# Altium PCB Temperature_Controller_2.PcbDoc
Units mm, origin at the board's own origin, x right, y up, seen from the top; angles counter-clockwise.
Board outline 86.61 x 96.9 mm, 2 copper layers (Top Layer, Bottom Layer), stack 1.4 mm thick; 29 components, 31 nets, 114 pads, 11 vias.
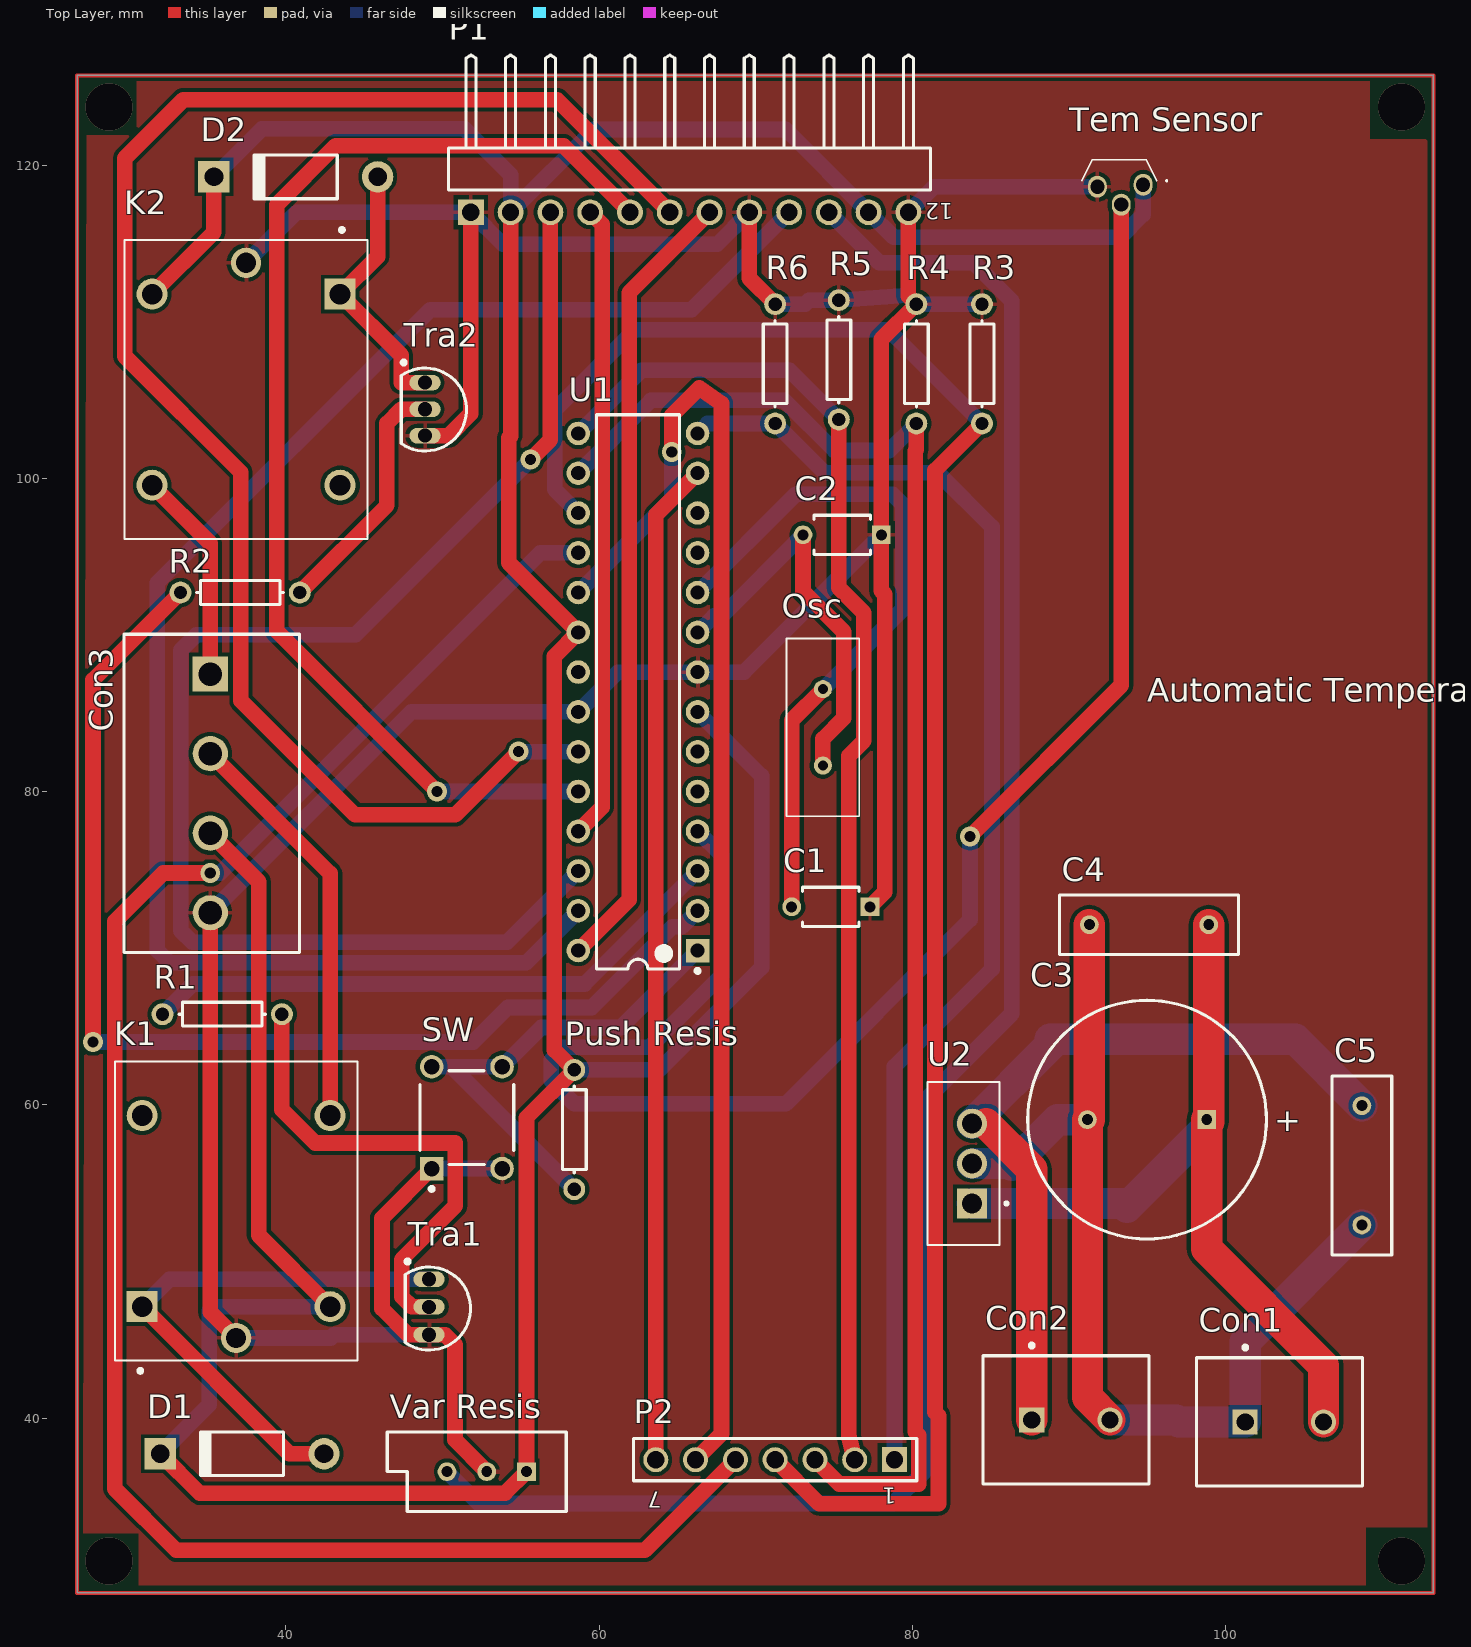
[diagram p0: Top Layer view]
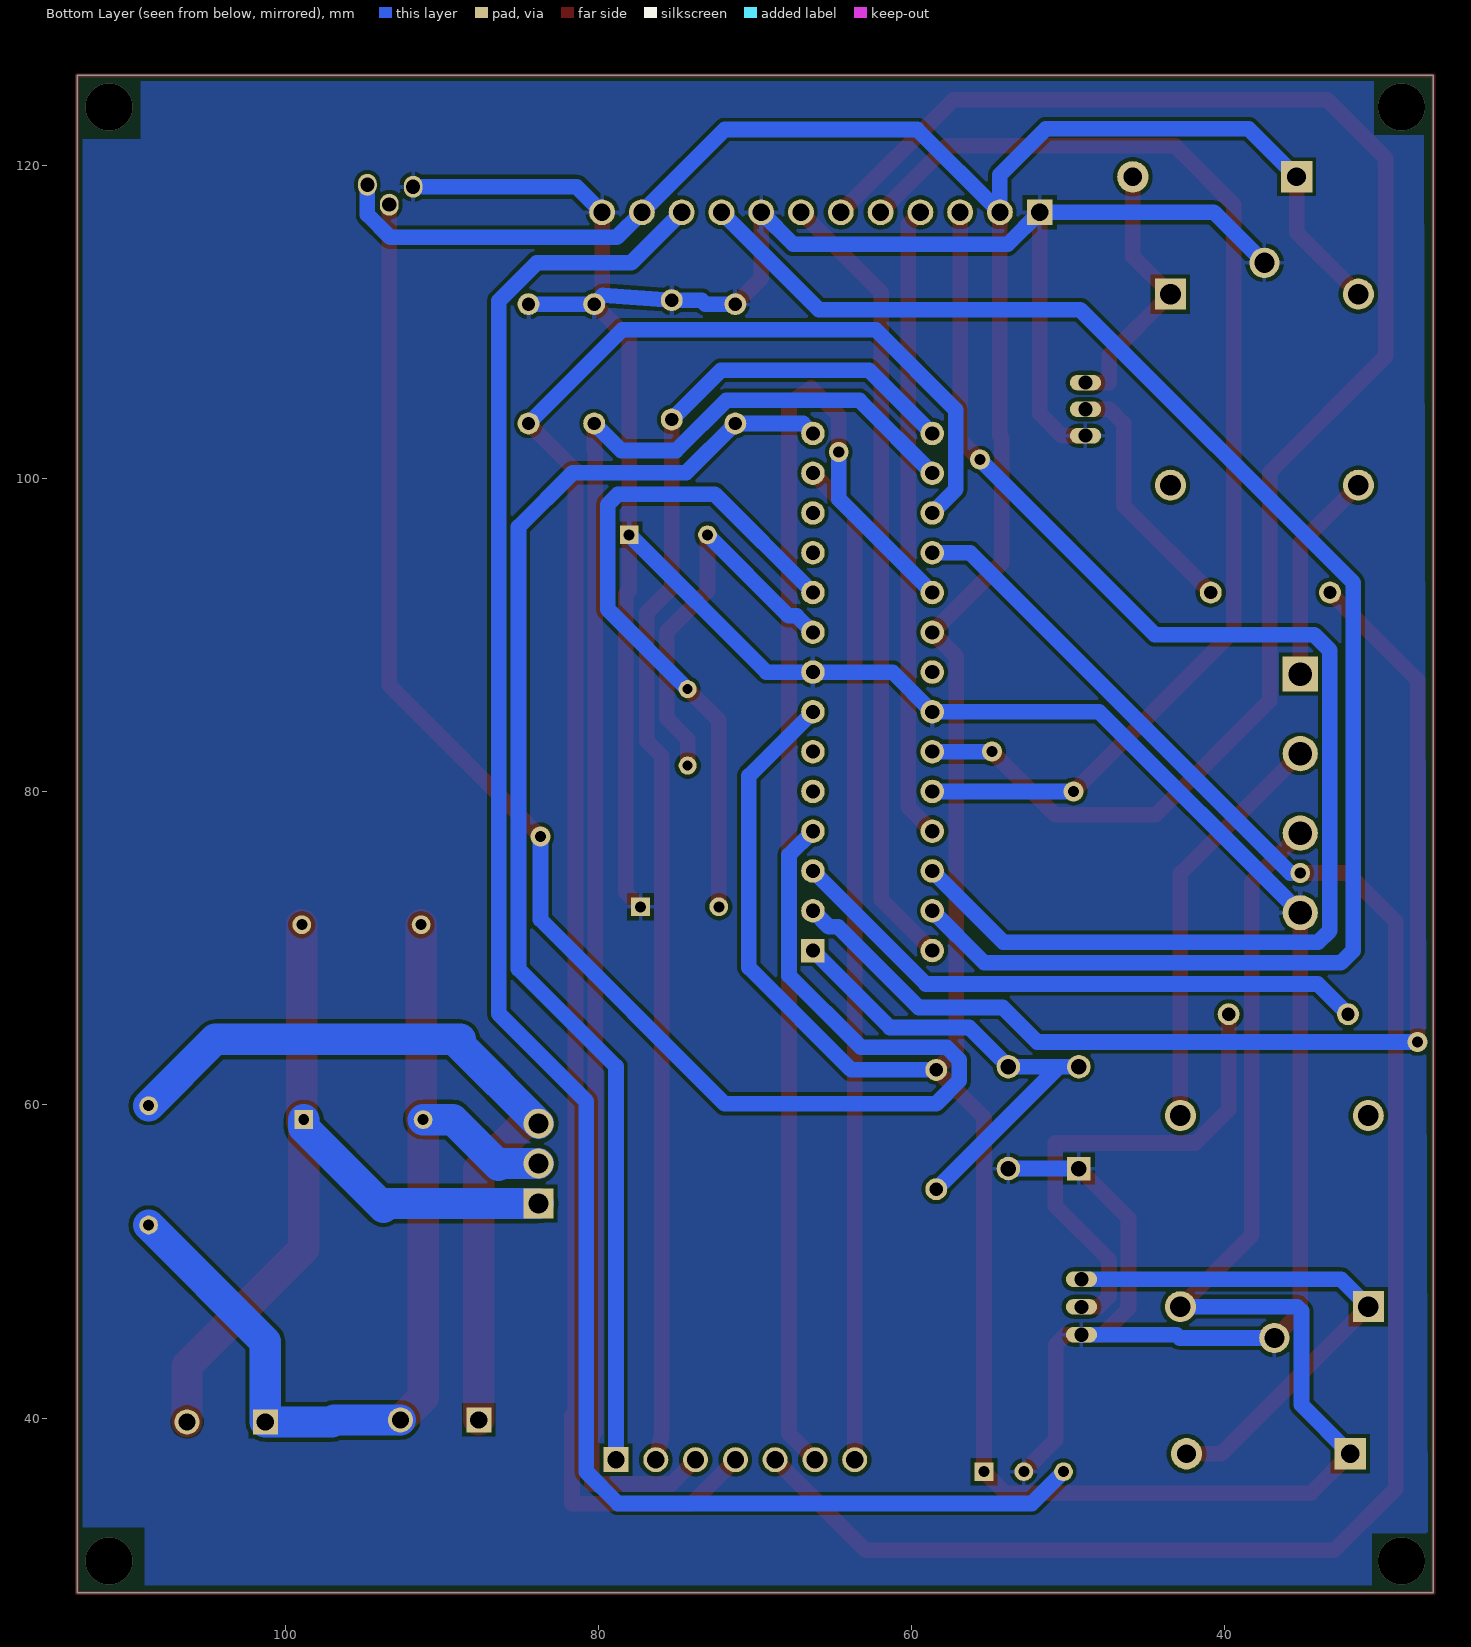
[diagram p1: Bottom Layer view, seen from below]

## Layer stack, top to bottom
Top Solder: solder mask 0.1, Solder Resist, Dk 3.5
Top Layer: signal copper 0.3
Dielectric 1: dielectric 0.8, FR-4, Dk 4.8
Bottom Layer: signal copper 0.3
Bottom Solder: solder mask 0.1, Solder Resist, Dk 3.5

## Board outline
26.67,28.829 26.67,125.73 113.284,125.73 113.284,28.829

## Design rules (kind name [scope] priority, off if disabled: settings)
Clearance [All] p1: gap=0.254 ignorepadtopadclearanceinfootprint=FALSE except(0: Arc-Hole Track-Hole SMDPad-Hole THPad-Hole Via-Hole Fill-Hole Poly-Hole Region-Hole Text-Hole)
HoleSize [All] p1: absolutevalues=TRUE maxlimit=3 minlimit=0.025 maxpercent=80.000 minpercent=20.000
PolygonConnect [All] p1: connectstyle=Relief reliefconductorwidth=0.254 reliefentries=4 polygonreliefangle="90 Angle" airgapwidth=0.254
RoutingVias [All] p1: holewidth=0.711 width=1.27 viastyle="Through Hole" minholewidth=0.711 minwidth=1.27 maxholewidth=0.711 maxwidth=1.27
SilkToSolderMaskClearance [IsText] p1: minsilkscreentomaskgap=0.254 clearancetoexposedcopper=TRUE
SolderMaskExpansion [All] p1: expansion=0.102 istentingtop=FALSE
Width [All] p1: maxlimit=2 minlimit=0.254 preferedwidth=1
28 further rules are at their usual default settings.

## Components (designator, comment, footprint, x,y, rotation, side; value= is the part's Value field where it differs from the comment)
C1 "" FP-RCE0K1-MFG 74.803,72.644 r180 top
C2 "" FP-RCE0K1-MFG 75.525,96.393 r180 top
C3 "Cap Pol1" RB7.6-15 94.996,59.055 r0 top value=470uF
C4 "Cap" RAD-0.3 95.123,71.501 r0 top value=0.01uF
C5 "Cap" RAD-0.3 108.712,56.134 r90 top value=0.01uF
Con1 "282836-2" TECO-282836-2_V 103.759,39.751 r0 top
Con2 "282836-2" TECO-282836-2_V 90.13,39.878 r0 top
Con3 "691244510004" 691244510004 35.279,79.883 r270 top
D1 "Diode 1N4004" DO-41 37.211,37.719 r180 top
D2 "Diode 1N4004" DO-41 40.64,119.253 r180 top
K1 "SRD-05VDC-SL-C" RELAY_SRD-05VDC-SL-C 36.83,53.213 r90 top
K2 "SRD-05VDC-SL-C" RELAY_SRD-05VDC-SL-C 37.465,105.664 r270 top
Osc "ECS-80-20-4X" ECS80204X 74.295,81.661 r90 top
P1 "61301211021" 61301211021 65.786,119.761 r180 top
P2 "61300711121" 61300711121 71.247,37.338 r180 top
"Push Resis" "Res1" AXIAL-0.3 58.42,58.42 r90 top value=10K (schematic designator "Resis Push?")
R1 "Res1" AXIAL-0.3 35.941,65.786 r180 top value=10K
R2 "Res1" AXIAL-0.3 37.084,92.71 r180 top value=10K
R3 "Res1" AXIAL-0.3 84.455,107.315 r270 top value=10K
R4 "Res1" AXIAL-0.3 80.264,107.315 r270 top value=10K
R5 "Res1" AXIAL-0.3 75.311,107.569 r270 top value=10K
R6 "Res1" AXIAL-0.3 71.247,107.315 r270 top value=10K
SW "1825910-6" TECO-1825910-6_V 51.562,59.182 r90 top (schematic designator SW?)
"Tem Sensor" "LM35CZ_NOPB" TL431CLP 94.488,118.999 r0 top
Tra1 "NPN" TO-226-AA#1 49.149,46.99 r180 top
Tra2 "NPN" TO-226-AA#2 48.895,104.394 r180 top
U1 "ATmega328P-PU" 28P3 62.484,86.36 r180 top
U2 "L7805CV" TO255P1040X460X1968-3 83.82,53.701 r90 top
"Var Resis" "RPot" VR5 52.832,36.576 r180 top value=1K (schematic designator "Var Resis?")

## Footprints (in the part's own frame and the unit in brackets; to place one, negate y for a bottom-side part, rotate by r counter-clockwise, add the part's x,y. Pads: shape width x height; smd on the part's side, far side on the other; paste and mask are expansions set on the pad)
28P3 [mm] "28-Pin Plastic Dual In-Line Package (PDIP)"
  rect 1.5x1.5 hole 0.9: 1(-3.81,16.51)
  round 1.5 hole 0.9: 2(-3.81,13.97) 3(-3.81,11.43) 4(-3.81,8.89) 5(-3.81,6.35) 6(-3.81,3.81) 7(-3.81,1.27) 8(-3.81,-1.27) 9(-3.81,-3.81) 10(-3.81,-6.35) 11(-3.81,-8.89) 12(-3.81,-11.43) 13(-3.81,-13.97) 14(-3.81,-16.51) 15(3.81,-16.51) 16(3.81,-13.97) 17(3.81,-11.43) 18(3.81,-8.89) 19(3.81,-6.35) 20(3.81,-3.81) 21(3.81,-1.27) 22(3.81,1.27) 23(3.81,3.81) 24(3.81,6.35) 25(3.81,8.89) 26(3.81,11.43) 27(3.81,13.97) 28(3.81,16.51)
  silkscreen extent -3.94,-17.7 2.65,17.93, body extent -3.6,-17.65 3.6,17.65, height 4.58
61300711121 [mm] "Pin Header, pitch 2.54 mm, THT, Vertical, single row, 7p"
  rect 1.6x1.6 hole 1.1: 1(-7.62,0)
  round 1.6 hole 1.1: 2(-5.08,0) 3(-2.54,0) 4(0,0) 5(2.54,0) 6(5.08,0) 7(7.62,0)
  silkscreen extent -9.04,-1.34 9.04,1.34, body extent -8.89,-1.27 8.89,1.27, height 8.57
61301211021 [mm] "Pin Header, pitch 2.54 mm, THT, Angled, single row, 12p"
  rect 1.65x1.65 hole 1.1: 1(13.97,2.77)
  round 1.65 hole 1.1: 2(11.43,2.77) 3(8.89,2.77) 4(6.35,2.77) 5(3.81,2.77) 6(1.27,2.77) 7(-1.27,2.77) 8(-3.81,2.77) 9(-6.35,2.77) 10(-8.89,2.77) 11(-11.43,2.77) 12(-13.97,2.77)
  silkscreen extent -15.39,-7.27 15.39,1.34, body extent -15.24,-7.27 15.24,3.09, height 2.58
691244510004 [mm] "Serie 2445 - 5.08 mm _ 4 pins"
  rect 2.25x2.25 hole 1.5: 1(-7.62,-0.1)
  round 2.25 hole 1.5: 2(-2.54,-0.1) 3(2.54,-0.1) 4(7.62,-0.1)
  silkscreen extent -10.16,-5.6 10.16,5.6, body extent -10.16,-5.6 10.16,5.6, height 18.1
AXIAL-0.3 [mm] "Axial Device, Thru-Hole; 2 Leads; 0.3 in Pin Spacing"
  round 1.4 hole 0.85: 1(-3.81,0) 2(3.81,0)
  silkscreen extent -2.77,-0.76 2.77,0.76
DO-41 [mm] "Diode, Axial; Body 5.2 x 2.7 mm (LxDia. max), Lead Dia. 0.86 mm (max)"
  round 2 hole 1.2: 1(-5.23,0)
  rect 2x2 hole 1.2: 2(5.23,0)
  silkscreen extent -2.65,-1.4 2.75,1.4
ECS80204X [mm]
  round 1.155 hole 0.63: 1(0,0) 2(4.88,0)
  silkscreen extent -3.23,-2.33 8.11,2.33
FP-RCE0K1-MFG [mm]
  rect 1.2x1.2 hole 0.7 paste-1000 mask+0: 1(-2.5,0)
  round 1.2 hole 0.7 paste-1000 mask+0: 2(2.5,0)
  silkscreen extent -1.8,-1.25 1.8,1.25, body extent -3.2,-1.35 3.2,1.35, height 0.25
RAD-0.3 [mm] "Radial Cap, Thru-Hole; 2 Leads; 0.3 in Pin Spacing"
  round 1.2 hole 0.7: 1(-3.81,0) 2(3.81,0)
  silkscreen extent -5.71,-1.91 5.71,1.91
RB7.6-15 [mm] "Polarized Capacitor (Radial); 2 Leads"
  rect 1.2x1.2 hole 0.7: 1(3.81,0)
  round 1.2 hole 0.7: 2(-3.81,0)
  silkscreen extent -7.62,-7.62 7.62,7.62
RELAY_SRD-05VDC-SL-C [mm]
  rect 1.98x1.98 / inner round 1.98 / far side rect 1.98x1.98 hole 1.32: A1(-6.1,6)
  round 1.98 hole 1.32: A2(-6.1,-6) NC(6.1,6) NO(6.1,-6)
  round 1.935 hole 1.29: COM(-8.1,0)
  silkscreen extent -10.3,-7.75 9.55,7.75, body extent -9.6,-7.8 9.6,7.8, height 15.8
TECO-282836-2_V [mm] "Female Header, Pitch 5mm, 1 x 2 Position, Height 10mm"
  rect 1.6x1.6 hole 1.1: 1(-2.5,0)
  round 1.6 hole 1.1: 2(2.5,0)
  silkscreen extent -5.6,-4.1 5,4.87, body extent -5.6,-4.1 5,4.1, height 10
TECO-1825910-6_V [mm] "Switch, 4-Leads, Body 5.99x5.99mm"
  rect 1.5x1.5 hole 0.99: 1(-3.25,2.25)
  round 1.5 hole 0.99: 2(3.25,2.25) 3(-3.25,-2.25) 4(3.25,-2.25)
  silkscreen extent -4.67,-3 3,3, body extent -3,-2.99 2.99,3, height 5
TL431CLP [mm]
  oval 1.2x1.4 hole 0.9: 1(0.254,-0.254) 2(-1.143,-1.524) 3(-2.667,-0.381)
  silkscreen extent -3.67,-0.05 1.81,1.35, body extent -3.81,-3.3 1.02,0.38, height 12.52
TO255P1040X460X1968-3 [mm]
  rect 1.91x1.91 / inner round 1.91 / far side rect 1.91x1.91 hole 1.27: 1(0,0)
  round 1.91 hole 1.27: 2(2.55,0) 3(5.1,0)
  silkscreen extent -2.65,-2.29 7.75,2.86, body extent -4.98,-1.76 4.98,2.69, height 19.68
TO-226-AA#1 [mm] "TO, Flat Index; 3 In-Line, Axial Leads; Body Dia. 4.8mm; Leads 0.55 x 0.51 mm (max)"
  oval 2x1 hole 0.9: 1(0,-1.87) 2(0,-0.11) 3(0,1.67)
  silkscreen extent -2.65,-3.13 1.52,2.65, body extent -2.65,-2.66 1.52,2.66, height 5.33
TO-226-AA#2 [mm] "TO, Flat Index; 3 In-Line, Axial Leads; Body Dia. 4.8mm; Leads 0.55 x 0.51 mm (max)"
  oval 2x1 hole 0.9: 1(0,-1.72) 2(0,-0.02) 3(0,1.67)
  silkscreen extent -2.65,-3.13 1.52,2.65, body extent -2.65,-2.66 1.52,2.66, height 5.33
VR5 [mm] "Thru-Hole; 3 Leads"
  rect 1.2x1.2 hole 0.7: 1(-2.54,0)
  round 1.2 hole 0.7: 2(0,0) 3(2.54,0)
  silkscreen extent -5.08,-2.54 6.35,2.54

## Part data
C1 C2: library part CMP-06035-004895-1, "Cap Ceramic 22pF 50V C0G ±5% Radial 5mm +125°C Automotive Bulk", Capacitance=22pF, Case/Package=Radial, Dielectric=C0G, Max Operating Temperature=125°C, Min Operating Temperature=-55°C, Package Quantity=2000, Ratings=AEC-Q200, Resistor Type=Ceramic, Tolerance=5%, Voltage Rating=50V, Height=3.5mm, Height - Seated (Max)=0.138inch, Lead Diameter=0.5mm, Lead Pitch=0.197inch, Lead/Base Style="Formed Leads", Length=0.142inch, Mount="Through Hole", Packaging="Tape and Reel", Termination=Radial, Voltage Rating (DC)=50V, Width=0.098inch
C3: "Polarized Capacitor (Radial)", LatestRevisionDate=17-Jul-2002, LatestRevisionNote="Re-released for DXP Platform.", PackageDescription="Polarized Capacitor (Radial); 2 Leads", PackageReference=RB7.6-15, Published=8-Jun-2000, Publisher="Altium Limited"
C4 C5: "Capacitor", LatestRevisionDate=17-Jul-2002, LatestRevisionNote="Re-released for DXP Platform.", PackageDescription="Radial Cap, Thru-Hole; 2 Leads; 0.3 in Pin Spacing", PackageReference=RAD-0.3, Published=8-Jun-2000, Publisher="Altium Limited"
Con1 Con2: library part CMP-1684-00017-1, "Female Header, Pitch 5 mm, 1 x 2 Position, Height 10 mm, Tail Length 3.5 mm, Rohs, Bulk", Color=Green, Current=13.5A, Manufacturer="TE Connectivity", Package Description="Female Header, Pitch 5 mm, 1 x 2 Position, Height 10 mm, Tail Length 3.5 mm", Package Reference=THD, Standard Package=300, Voltage=300V, 3D Model=282836-2.pdf, Category=Connectors,Interconnects, Clamp Material - Plating=Brass-NickelPlated, Contact Material - Plating=Brass-TinPlated, Datasheet URL=http://www.te.com.cn/commerce/DocumentDelivery/DDEController?Action=showdoc&DocId=Catalog+Section%7F1308389_EUROSTYLE_TERMINAL_BLOCKS%7F0607%7Fpdf%7FEnglish%7FENG_CS_1308389_EUROSTYLE_TERMINAL_BLOCKS_0607.pdf%7F282836-2, Dynamic Catalog=BuchananSeries, Family=TerminalBlocks-WiretoBoard, Featured Product=EurostyleTerminalBlockConnectors, Features=Interlocking(Side), Housing Material=Polyamide(PA66),Nylon6/6, Manufacturer URL=http://www.te.com, Mating Orientation=HorizontalwithBoard, Mounting Type=ThroughHole, Number of Levels=1, Other Names="5ULV-02B / A98076", Packaging=Bulk, Pitch="0.197\"(5.00mm)", Positions Per Level=2, Product Training Modules=Wire-to-BoardEurostyleTerminalBlocks, RoHS Information=282836-2StatementofCompliance, Screw Material - Plating=Brass-NickelPlated, Screw Thread=M3, Series=Buchanan, Torque - Screw=0.68Nm(6Lb-In), Wire Gauge=16-30AWG, Wire Termination=Screw-RisingCageClamp
Con3: library part CMP-1502-02650-1, "Serie 2445 - 5.08 mm Horizontal Entry Modular with Rising Cage Clamp WR-TBL, 4 pin", Manufacturer="Wurth Elektronik", Operating Temperature=-30to120degC, Datasheet URL=http://katalog.we-online.de/em/datasheet/6912445100xx.pdf, Manufacturer URL=http://www.we-online.de, Mounting Technology=THT, Package Reference=691244510004, Packaging=Box, Part Number=691244510004, Pin Number=4, Pitch=5.08mm, Publisher=WurthElektronik
D1 D2: "1 Amp General Purpose Rectifier", Code_JEDEC=DO-204-AL, ComponentLink1Description="Manufacturer Link", ComponentLink1URL=http://www.fairchildsemi.com/, ComponentLink2Description=Datasheet, ComponentLink2URL=http://www.fairchildsemi.com/ds/1N%2F1N4001.pdf, DatasheetVersion=1998, LatestRevisionDate=17-Jul-2002, LatestRevisionNote="Re-released for DXP Platform.", PackageDescription="Diode, Axial; Body 5.2 x 2.7 mm (LxDia. max), Lead Dia. 0.86 mm (max)", PackageReference=DO-41, PackageVersion=Aug-1999, Published=8-Jun-2000, Publisher="Altium Limited"
K1 K2: "5V Trigger Relay Module For Arduino And Raspberry Pi 5V Trigger Relay Module For Arduino And Raspberry Pi", Package="NON STANDARD-5 Songle Relay", Availability="Not in stock", Check_prices=https://www.snapeda.com/parts/SRD-05VDC-SL-C/Songle+Relay/view-part/?ref=eda, MF="Songle Relay", MP=SRD-05VDC-SL-C, Price=None, SnapEDA_Link=https://www.snapeda.com/parts/SRD-05VDC-SL-C/Songle+Relay/view-part/?ref=snap
Osc: "Crystals 8MHz 20pF", Manufacturer_Name=ECS, Mouser Part Number=520-HCU800-20X, Datasheet Link=https://componentsearchengine.com/Datasheets/1/ECS-80-20-4X.pdf, Geometry.Height=3.5mm, Manufacturer_Part_Number=ECS-80-20-4X, Mouser Price/Stock=https://www.mouser.co.uk/ProductDetail/ECS/ECS-80-20-4X?qs=Plv2eWRe7VJH6hqFYPCsSw%3D%3D
P1: library part CMP-1502-01085-1, "THT Angled Pin Header WR-PHD, Pitch 2.54 mm, Single Row, 12 pins", Contact Resistance=20mOhm, Manufacturer="Wurth Elektronik", Operating Temperature=-40to105degC, Rated Current=3A, Withstanding Voltage=500VAC, Working Voltage=250VAC, Datasheet URL=https://katalog.we-online.de/em/datasheet/6130xx11021.pdf, Gender=Male, Manufacturer URL=http://www.we-online.de, Mounting Technology=THT, Orientation=Angled, Package Reference=61301211021, Packaging=Bag, Part Number=61301211021, Pin Number=12, Pitch=2.54mm, Publisher=WurthElektronik, Row Number=Single
P2: library part CMP-1502-01074-1, "THT Vertical Pin Header WR-PHD, Pitch 2.54 mm, Single Row, 7 pins", Contact Resistance=20mOhm, Manufacturer="Wurth Elektronik", Operating Temperature=-40to105degC, Rated Current=3A, Withstanding Voltage=500VAC, Working Voltage=250VAC, Datasheet URL=https://katalog.we-online.de/em/datasheet/6130xx11121.pdf, Gender=Male, Manufacturer URL=http://www.we-online.de, Mounting Technology=THT, Orientation=Vertical, Package Reference=61300711121, Packaging=Bag, Part Number=61300711121, Pin Number=7, Pitch=2.54mm, Publisher=WurthElektronik, Row Number=Single
"Push Resis" R1 R2 R3 R4 R5 R6: "Resistor", LatestRevisionDate=17-Jul-2002, LatestRevisionNote="Re-released for DXP Platform.", PackageDescription="Axial Device, Thru-Hole; 2 Leads; 0.3 in Pin Spacing", PackageReference=AXIAL-0.3, Published=8-Jun-2000, Publisher="Altium Limited"
SW: library part CMP-1684-00021-1, "Tact Switch, SPST-NO, 0.05 A, -35 to 85 degC, 4-Pin THD, RoHS, Bulk", Actuator Color=Black, Contact Rating @ Voltage=0.05A@24VDC, Dielectric Strength=500VAC, Manufacturer="TE Connectivity", Maximum AC Voltage Rating=N/A, Maximum Contact Resistance=100mOhm, Maximum DC Voltage Rating=24V, Minimum Insulation Resistance=100MOhm, Operating Temperature=-35to85C, Package Description="4-Pin Through Hole Device, Body 5.99 x 5.99 mm, Pitch 6.5 mm", Package Reference=THD, Actuator Length=1.4mm, Actuator Material=PolybutyleneTerephthalate, Actuator Style=RoundButton, Base Material=N/A, Body Orientation=Straight, Bushing Type=Unthreaded, Contact Material=CopperAlloy, Contact Plating=Silver, Datasheet URL=http://www.te.com/commerce/DocumentDelivery/DDEController?Action=showdoc&DocId=Customer+Drawing%7F1825910%7FC9%7Fpdf%7FEnglish%7FENG_CD_1825910_C9.pdf%7F1825910-6, Datasheet Version="Rev. C9", Dimension=5.99x5mm, Electrical Life=100000Cycles, Family=1825910, Function=MomentaryContact, Housing Material=N/A, Illumination=N/R, Manufacturer URL=http://www.te.com, Mechanical Life=100000Cycles, Mounting=ThroughHole, Packaging=N/A, Part No=1825910-6, Pole Throw Configuration=SPST, Product Weight=N/A, RoHS=Yes, Seal Description=N/A, Seal Location=N/A, Switch Configuration=OFF(ON), Terminal Type=PCPins, Thread Size=N/R
"Tem Sensor": "+/-0.5C Temperature Sensor with Analog Output and 30V Capability", Manufacturer_Name="Texas Instruments", Manufacturer_Part_Number=LM35CZ/NOPB, Mouser Part Number=926-LM35CZ/NOPB, Datasheet Link=http://www.ti.com/lit/gpn/LM35, Geometry.Height=9.34mm, Mouser Price/Stock=https://www.mouser.co.uk/ProductDetail/Texas-Instruments/LM35CZ-NOPB?qs=QbsRYf82W3Fna65sQVTdFw%3D%3D
Tra1 Tra2: "NPN Bipolar Transistor", Code_JEDEC=TO-226-AA, LatestRevisionDate=17-Jul-2002, LatestRevisionNote="Re-released for DXP Platform.", PackageDescription="TO, Flat Index; 3 In-Line, Axial Leads; Body Dia. 4.8mm; Leads 0.55 x 0.51 mm (max)", PackageReference=TO-226-AA, Published=8-Jun-2000, Publisher="Altium Limited"
U1: library part CMP-0095-00013-2, "8-bit AVR Microcontroller, 32KB Flash, 1KB EEPROM, 2KB SRAM, 28-pin PDIP, Industrial Grade (-40°C to 85°C)", ComponentLink1Description="Manufacturer URL", ComponentLink1URL=http://www.atmel.com/, ComponentLink2Description="ATmega48A/48PA/88A/88PA/168A/168PA/328/328P Datasheet", ComponentLink2URL=http://www.atmel.com/dyn/resources/prod_documents/8271.pdf, ComponentLink3Description="ATmega48A/48PA/88A/88PA/168A/168PA/328/328P Summary", ComponentLink3URL=http://www.atmel.com/dyn/resources/prod_documents/8271S.pdf, DatasheetVersion="revD, May-2011", PackageDescription="28-lead (0.300\"/7.62mm Wide) Plastic Dual Inline Package (PDIP)", PackageReference=28P3, PackageVersion="revB, Sep-2001", RevisionNote="DatasheetVersion updated. URLs added."
U2: "Linear Voltage Regulator IC Positive Fixed 1 Output 1.5A TO-220", Package="TO-220-3 ON Semiconductor", Availability="In Stock", Check_prices=https://www.snapeda.com/parts/L7805CV/STMicroelectronics/view-part/?ref=eda, MF=STMicroelectronics, MP=L7805CV, Price=None, Purchase-URL=https://pricing.snapeda.com/search/part/L7805CV/?ref=eda, SnapEDA_Link=https://www.snapeda.com/parts/L7805CV/STMicroelectronics/view-part/?ref=snap
"Var Resis": "Potentiometer", LatestRevisionDate=17-Jul-2002, LatestRevisionNote="Re-released for DXP Platform.", PackageDescription="Variable Resistor, Thru-Hole; 3 Leads", PackageReference=VR5, Published=8-Jun-2000, Publisher="Altium Limited", Set Position=0.5, Sim Note="Enter the Resistance value and the set point into parameter fields."

## Via types
v1: diameter 1.27, hole 0.711, Top Layer to Bottom Layer, 7 vias
v2: diameter 3, hole 3, Top Layer to Bottom Layer, 4 vias

## Nets (pads, with @x,y where several pads share a name; then routed paths per layer and width w, separated by ;. In a path a pad name is that pad's centre, name@x,y a point inside that pad or via, vN(x,y) a via of type N, cw(c..) or ccw(c..) an arc to the next point about the centre after c; other vN are vias at no path point)
GND: "Tem Sensor.3" "Var Resis.2" C1.1 C2.1 Con3.4 K1.COM K2.COM P1.1 P1.8 P1.12 R3.1 R4.1 R5.1 R6.1 SW.1 SW.3 Tra1.3 Tra2.3 U1.8 U1.22 | length 252.7
  Top Layer w1: Con3.4 35.179,46.764 K1.COM ; Tra2.3 50.4,102.724 51.816,104.14 P1.1 ; SW.1 46.141,52.761 46.141,46.99 47.811,45.32 Tra1.3 50.165,45.32 50.8,44.685 50.8,38.608 52.832,36.576 ; P1.8 69.596,112.776 R6.1 ; C1.1 78.251,73.592 78.251,92.602 78.025,92.828 C2.1 78.025,108.886 R4.1 79.756,111.633 P1.12
  Bottom Layer w1: Con3.4 48.006,85.09 U1.22 61.214,87.63 U1.8 69.262,87.63 C2.1 ; K1.COM 42.875,45.113 43.082,45.32 Tra1.3 ; K2.COM 40.692,116.991 P1.1 53.869,114.938 67.543,114.938 P1.8 ; SW.1 SW.3 ; R6.1 73.152,111.125 73.406,111.379 R5.1 79.705,111.684 R4.1 R3.1 ; P1.12 81.383,118.618 91.821,118.618
NetC1_2: C1.2 Osc.2 U1.10 | length 44.6
  Top Layer w1: C1.2 72.303,84.549 Osc.2
  Bottom Layer w1: U1.10 72.568,98.984 78.74,98.984 79.4,98.323 79.4,91.646 Osc.2
NetC2_2: C2.2 Osc.1 U1.9 | length 25.7
  Top Layer w1: C2.2 73.025,92.812 75.63,90.207 75.63,84.698 74.295,83.363 Osc.1
  Bottom Layer w1: U1.9 67.341,91.217 67.849,91.217 C2.2
NetC3_1: C3.1 C4.2 Con1.2 U2.1 | length 52.8
  Top Layer w1: C3.1 C3.1@98.933,58.928
  Top Layer w2: C3.1 98.806,50.8 106.259,43.347 Con1.2 ; C3.1@98.933,58.928 C4.2
  Bottom Layer w1: 93.472,53.701 93.716,53.457
  Bottom Layer w2: U2.1 93.472,53.701 ; 93.716,53.457 98.806,58.547 C3.1
NetC3_2: C3.2 C4.1 C5.1 Con1.1 Con2.2 U2.2 | length 65.2
  Top Layer w2: C3.2 91.186,41.322 Con2.2 ; C3.2@91.313,59.055 C4.1
  Bottom Layer w1: 86.261,56.251 86.369,56.143 ; 96.876,39.878 97.003,39.751
  Bottom Layer w2: U2.2 86.261,56.251 ; 86.369,56.143 89.281,59.055 C3.2 ; Con2.2 96.876,39.878 ; 97.003,39.751 Con1.1 101.259,44.871 C5.1
NetC5_2: C5.2 Con2.1 U2.3 | length 50.1
  Top Layer w1: U2.3 U2.3@84.709,58.801
  Top Layer w2: U2.3@84.709,58.801 87.63,55.88 Con2.1
  Bottom Layer w1: 88.814,63.795 88.814,64.186
  Bottom Layer w2: U2.3 88.814,63.795 ; 88.814,64.186 104.47,64.186 C5.2
NetCon3_1: Con3.1 K2.NO | length 13.6
  Top Layer w1: K2.NO 35.179,95.85 Con3.1
NetCon3_2: Con3.2 K1.NO | length 26.3
  Top Layer w1: Con3.2 42.83,74.772 K1.NO
NetD1_1: D1.1 K1.A1 Tra1.1 | length 34.5
  Top Layer w1: K1.A1 40.224,37.719 D1.1
  Bottom Layer w1: K1.A1 32.577,48.86 Tra1.1
NetD2_1: D2.1 K2.A1 Tra2.1 | length 17.3
  Top Layer w1: D2.1 45.87,114.169 K2.A1 47.371,107.858 47.371,106.114 Tra2.1
NetP1_3: P1.3 U1.26 | length 89.2
  Top Layer w1: v1(55.626,101.194) 56.896,102.464 P1.3
  Bottom Layer w1: v1(55.626,101.194) 44.45,90.018 34.29,90.018 33.299,89.027 33.299,71.12 34.036,70.383 54.127,70.383 U1.26
NetP1_4: P1.4 U1.25 | length 40.5
  Top Layer w1: U1.25 60.198,78.994 60.198,116.229 P1.4
NetP1_5: P1.5 U1.24 | length 76.6
  Top Layer w1: v1(49.657,80.01) 39.421,90.246 39.421,117.475 43.18,121.234 57.733,121.234 P1.5
  Bottom Layer w1: v1(49.657,80.01) U1.24
NetP1_6: P1.6 U1.23 | length 103.3
  Top Layer w1: v1(54.864,82.55) 50.825,78.511 44.425,78.511 37.135,85.801 37.135,100.381 29.718,107.798 29.718,120.447 33.452,124.181 57.326,124.181 P1.6
  Bottom Layer w1: v1(54.864,82.55) U1.23
NetP1_7: P1.7 U1.28 | length 50.6
  Top Layer w1: U1.28 61.925,73.101 61.925,111.86 P1.7
NetP1_9: P1.9 U1.27 | length 102.2
  Bottom Layer w1: U1.27 55.347,69.063 32.588,69.063 31.801,69.85 31.801,93.345 49.225,110.769 65.914,110.769 P1.9
NetP1_10: "Var Resis.3" P1.10 | length 123.3
  Bottom Layer w1: 50.292,36.576 52.324,34.544 78.74,34.544 80.772,36.576 80.772,60.223 86.36,65.811 86.36,111.328 83.922,113.767 77.9,113.767 P1.10
NetP2_1: P2.1 R6.2 U1.14 | length 83.9
  Bottom Layer w1: U1.14 66.929,103.505 R6.2 74.397,100.355 81.636,100.355 85.09,96.901 85.09,68.669 78.867,62.446 P2.1
NetP2_2: P2.2 R5.2 U1.15 | length 87.1
  Top Layer w1: R5.2 75.311,93.015 76.911,91.415 76.911,83.236 75.946,82.271 75.946,38.837 P2.2
  Bottom Layer w1: U1.15 62.713,106.909 72.161,106.909 R5.2
NetP2_3: P2.3 R4.2 U1.16 | length 100.7
  Top Layer w1: P2.3 75.341,35.784 80.421,35.784 80.421,38.887 80.188,39.121 80.188,101.752 80.264,101.829 R4.2
  Bottom Layer w1: U1.16 63.322,104.978 71.831,104.978 75.034,101.776 78.535,101.776 R4.2
NetP2_4: P2.4 R3.2 U1.17 | length 121
  Top Layer w1: P2.4 74.055,34.53 81.675,34.53 81.675,40.146 81.458,40.363 81.458,100.508 R3.2
  Bottom Layer w1: U1.17 57.17,99.294 57.17,104.369 62.301,109.499 78.461,109.499 R3.2
NetP2_5: P2.5 U1.18 | length 119.2
  Top Layer w1: v1(35.179,74.803) 32.182,74.803 29.083,71.704 29.083,35.484 33.02,31.547 62.916,31.547 P2.5
  Bottom Layer w1: v1(35.179,74.803) 35.814,74.803 56.261,95.25 U1.18
NetP2_6: P2.6 U1.19 | length 86.1
  Top Layer w1: v1(64.643,101.676) 64.643,104.013 66.396,105.766 67.818,104.775 67.818,38.989 P2.6
  Bottom Layer w1: U1.19 64.643,98.679 v1(64.643,101.676)
NetP2_7: P2.7 U1.13 | length 64.1
  Top Layer w1: P2.7 63.627,97.663 U1.13
NetR1_1: R1.1 Tra1.2 | length 31.3
  Top Layer w1: R1.1 39.751,59.69 41.885,57.556 50.825,57.556 50.825,53.545 47.395,50.114 47.395,47.76 48.055,47.1 Tra1.2
NetR1_2: R1.2 U1.3 | length 38
  Bottom Layer w1: R1.2 34.061,67.716 59.08,67.716 U1.3
NetR2_1: R2.1 Tra2.2 | length 15.9
  Top Layer w1: R2.1 46.457,98.273 46.457,103.505 47.366,104.414 Tra2.2
NetR2_2: R2.2 U1.2 | length 73.1
  Top Layer w1: v1(27.686,64.008) 27.686,87.122 R2.2
  Bottom Layer w1: v1(27.686,64.008) 51.968,64.008 54.178,66.218 59.538,66.218 64.694,71.374 65.278,71.374 U1.2
"NetResis Push?_1": "Push Resis.1" SW.2 SW.4 U1.1 | length 31.1
  Bottom Layer w1: SW.2 50.598,62.432 ; 58.42,54.61 50.598,62.432 ; U1.1 61.382,64.938 56.318,64.938 SW.4 50.598,62.432
"NetTem Sensor_2": "Tem Sensor.2" U1.4 | length 106.1
  Top Layer w1: v1(83.693,77.14) 93.345,86.792 93.345,117.475
  Bottom Layer w1: U1.4 67.818,75.946 67.818,68.256 63.246,63.684 57.766,63.684 56.947,62.865 56.947,61.544 58.42,60.071 71.933,60.071 83.693,71.831 v1(83.693,77.14)
VCC: "Push Resis.2" "Tem Sensor.1" "Var Resis.1" Con3.3 D1.2 D2.2 K1.A2 K2.A2 P1.2 P1.11 U1.7 U1.20 | length 274.9
  Top Layer w1: K2.A2 35.41,115.709 D2.2 ; D1.2 34.496,35.204 54,35.204 55.372,36.576 55.372,59.182 58.42,62.23 57.15,63.5 57.15,88.646 U1.20 54.237,94.607 54.237,102.583 54.356,102.702 P1.2 ; Con3.3 38.278,74.244 38.278,51.665 K1.A2
  Bottom Layer w1: D1.2 35.103,40.841 35.103,46.835 35.381,47.113 K1.A2 ; D2.2 38.483,122.326 51.41,122.326 54.356,119.38 P1.2 59.641,122.276 71.931,122.276 P1.11 78.815,115.392 93.294,115.392 94.742,116.84 94.742,118.745 ; 58.42,62.23 63.845,62.23 70.383,68.769 70.383,81.001 U1.7
pads on no net: K1.NC K2.NC U1.5 U1.6 U1.11 U1.12 U1.21
copper on no net: | length 367
  Top Layer w0.254: 26.67,28.829 113.284,28.829 113.284,125.73 26.67,125.73 26.67,28.829
  other v2: 28.702,30.861 111.252,30.861 28.702,123.698 111.252,123.698

## Polygon pours and split planes (outlines as drawn)
GND on Top Layer "GND_L01_P000" (solid, pour order 0): 27.305,121.92 30.48,121.92 30.48,125.349 109.22,125.349 109.22,121.666 112.776,121.666 112.903,121.539 112.903,33.02 108.966,33.02 108.966,29.337 30.607,29.337 30.607,32.639 27.051,32.639
GND on Bottom Layer "GND_L02_P001" (solid, pour order 1): 27.305,121.92 30.48,121.92 30.48,125.349 109.22,125.349 109.22,121.666 112.903,121.666 112.903,33.02 108.966,33.02 108.966,29.337 30.607,29.337 30.607,32.639 27.051,32.639

## Silkscreen, mask and mechanical layers (free items; w line width, h text height)
Top Overlay:
  text "Automatic Temperature Controller" at 94.996,85.725 h1.52
Mechanical 1:
  lines w0.254: 26.67,28.829 113.284,28.829 ; 26.67,28.829 26.67,125.73 ; 26.67,28.829 113.284,28.829 ; 26.67,28.829 26.67,125.73 ; 26.67,125.73 113.284,125.73 ; 26.67,125.73 113.284,125.73 ; 113.284,28.829 113.284,125.73 ; 113.284,28.829 113.284,125.73

## Text inside footprints (layer, text, board x,y; h text height)
C3: Top Overlay "+" at 103.128,58.318 h1.5
P1: Top Overlay "12" at 82.626,117.561 h1.02 r180
P2: Top Overlay "1" at 78.994,35.56 h1.02 r180; Top Overlay "7" at 64.008,35.306 h1.02 r180